# Altium PCB PowerBoard_System_pcb.PcbDoc
Units mm, origin at the board's own origin, x right, y up, seen from the top; angles counter-clockwise.
Board outline 56.84 x 56.84 mm, 2 copper layers (Top Layer, Bottom Layer); 30 components, 28 nets, 108 pads, 0 vias.
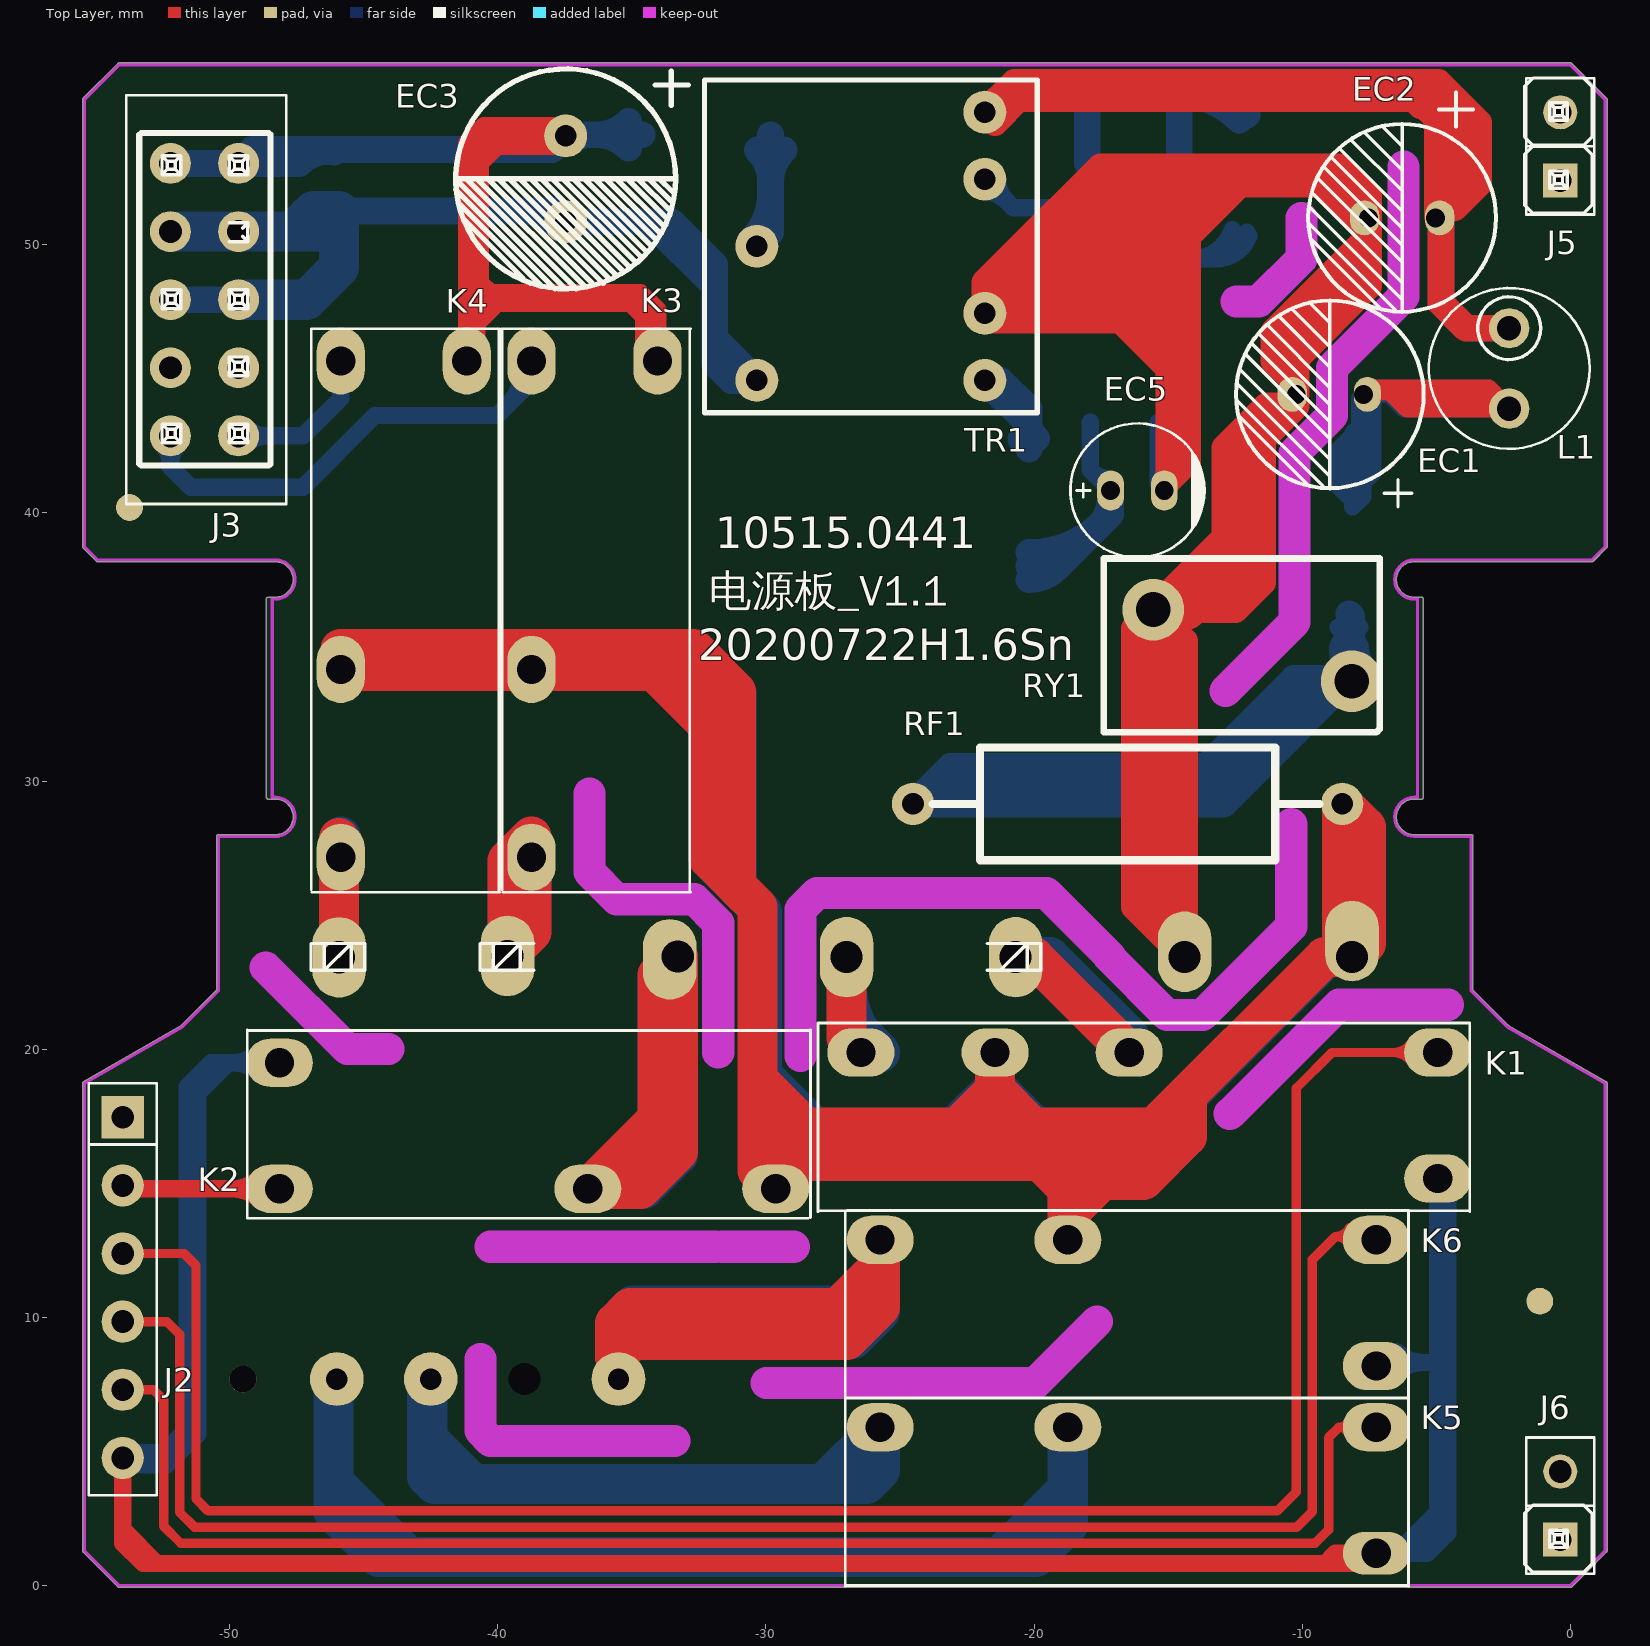
[diagram p0: Top Layer view]
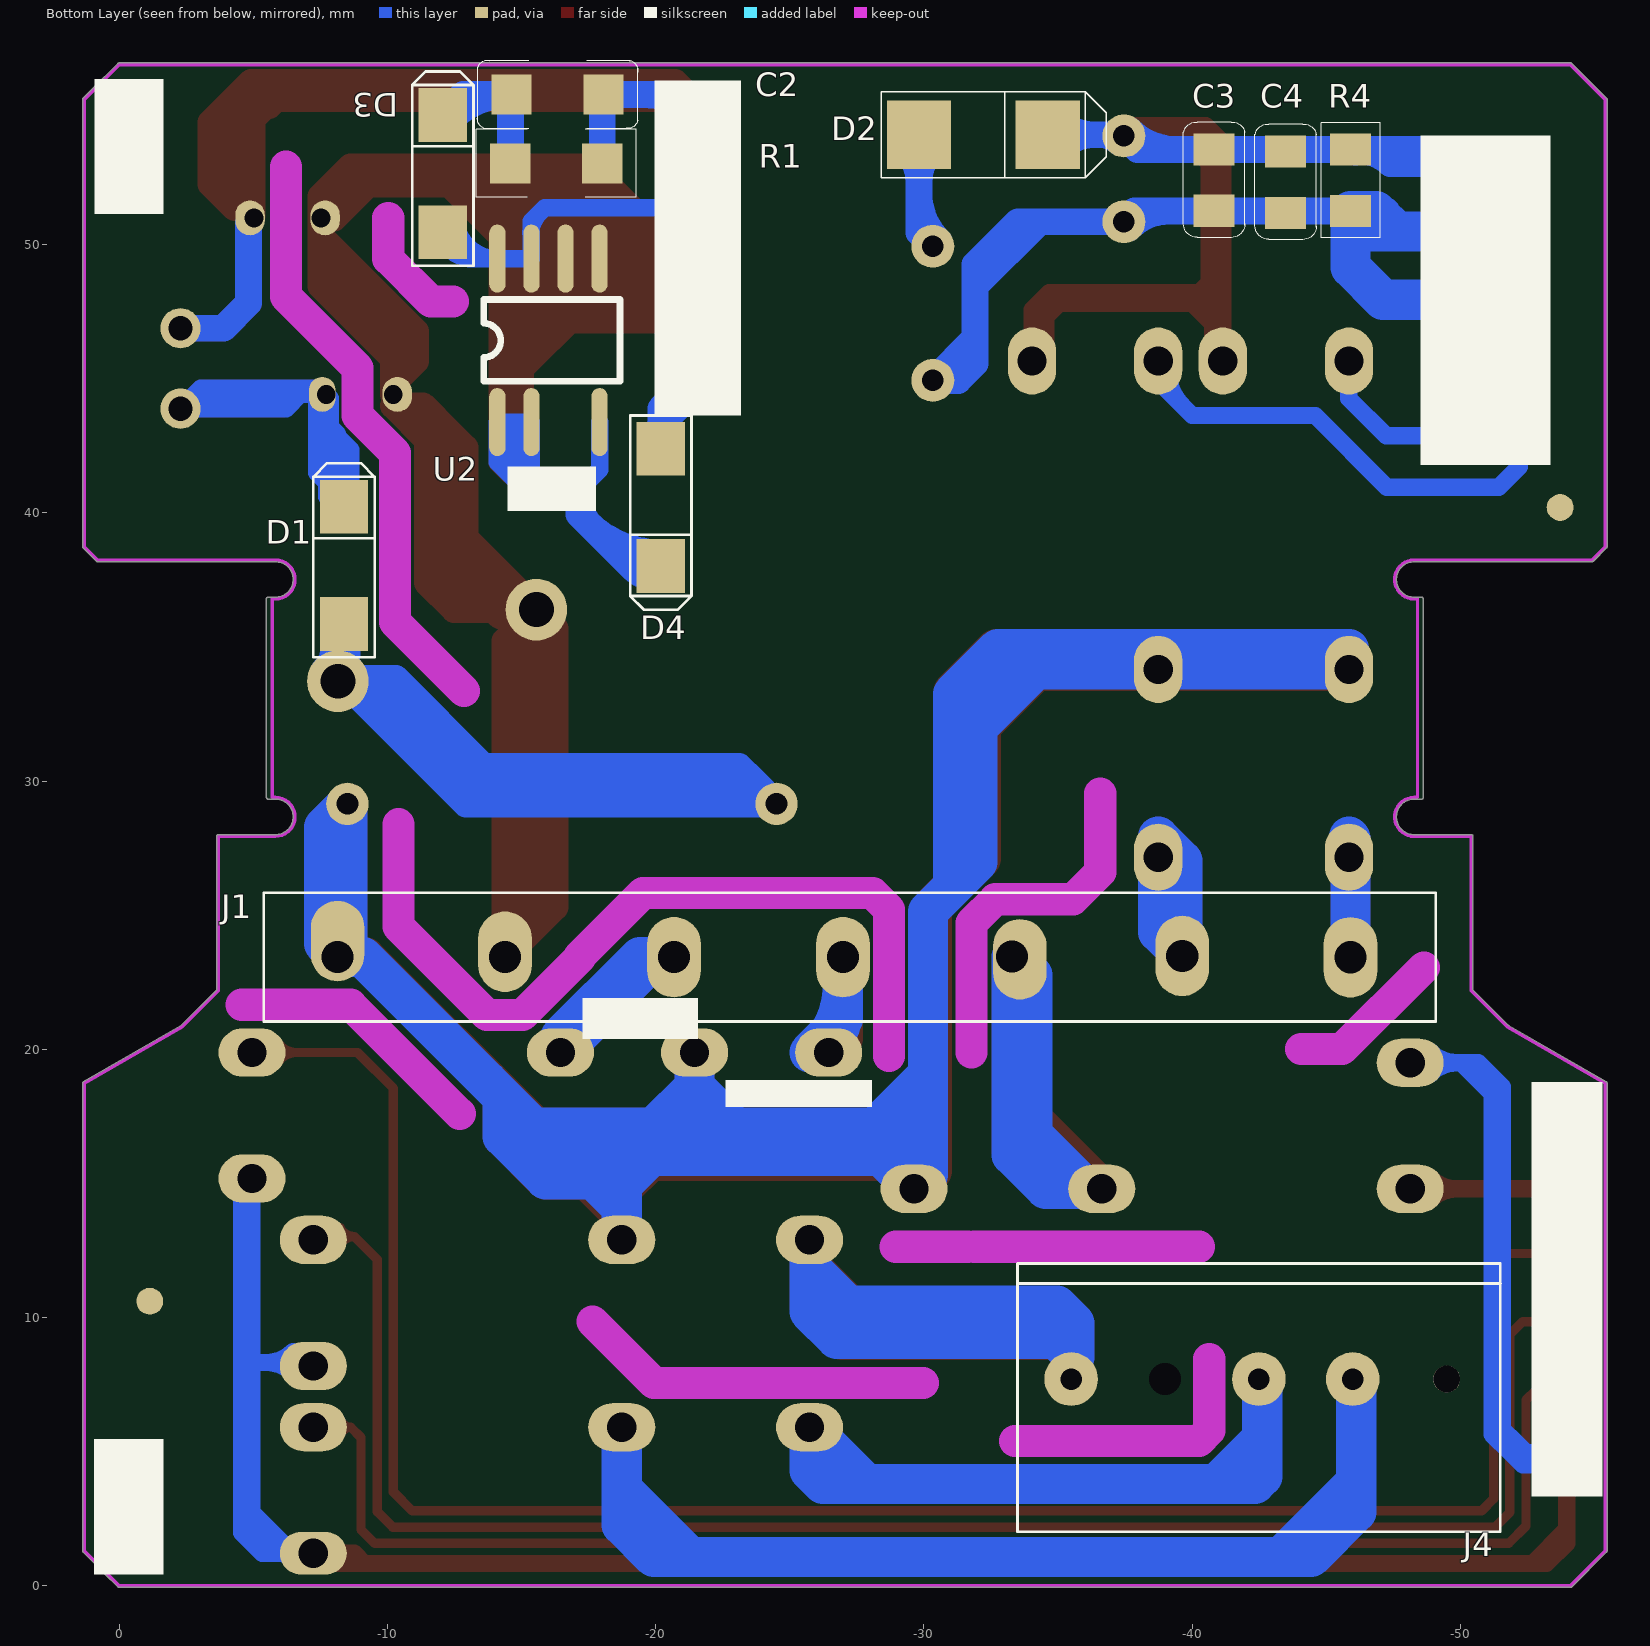
[diagram p1: Bottom Layer view, seen from below]
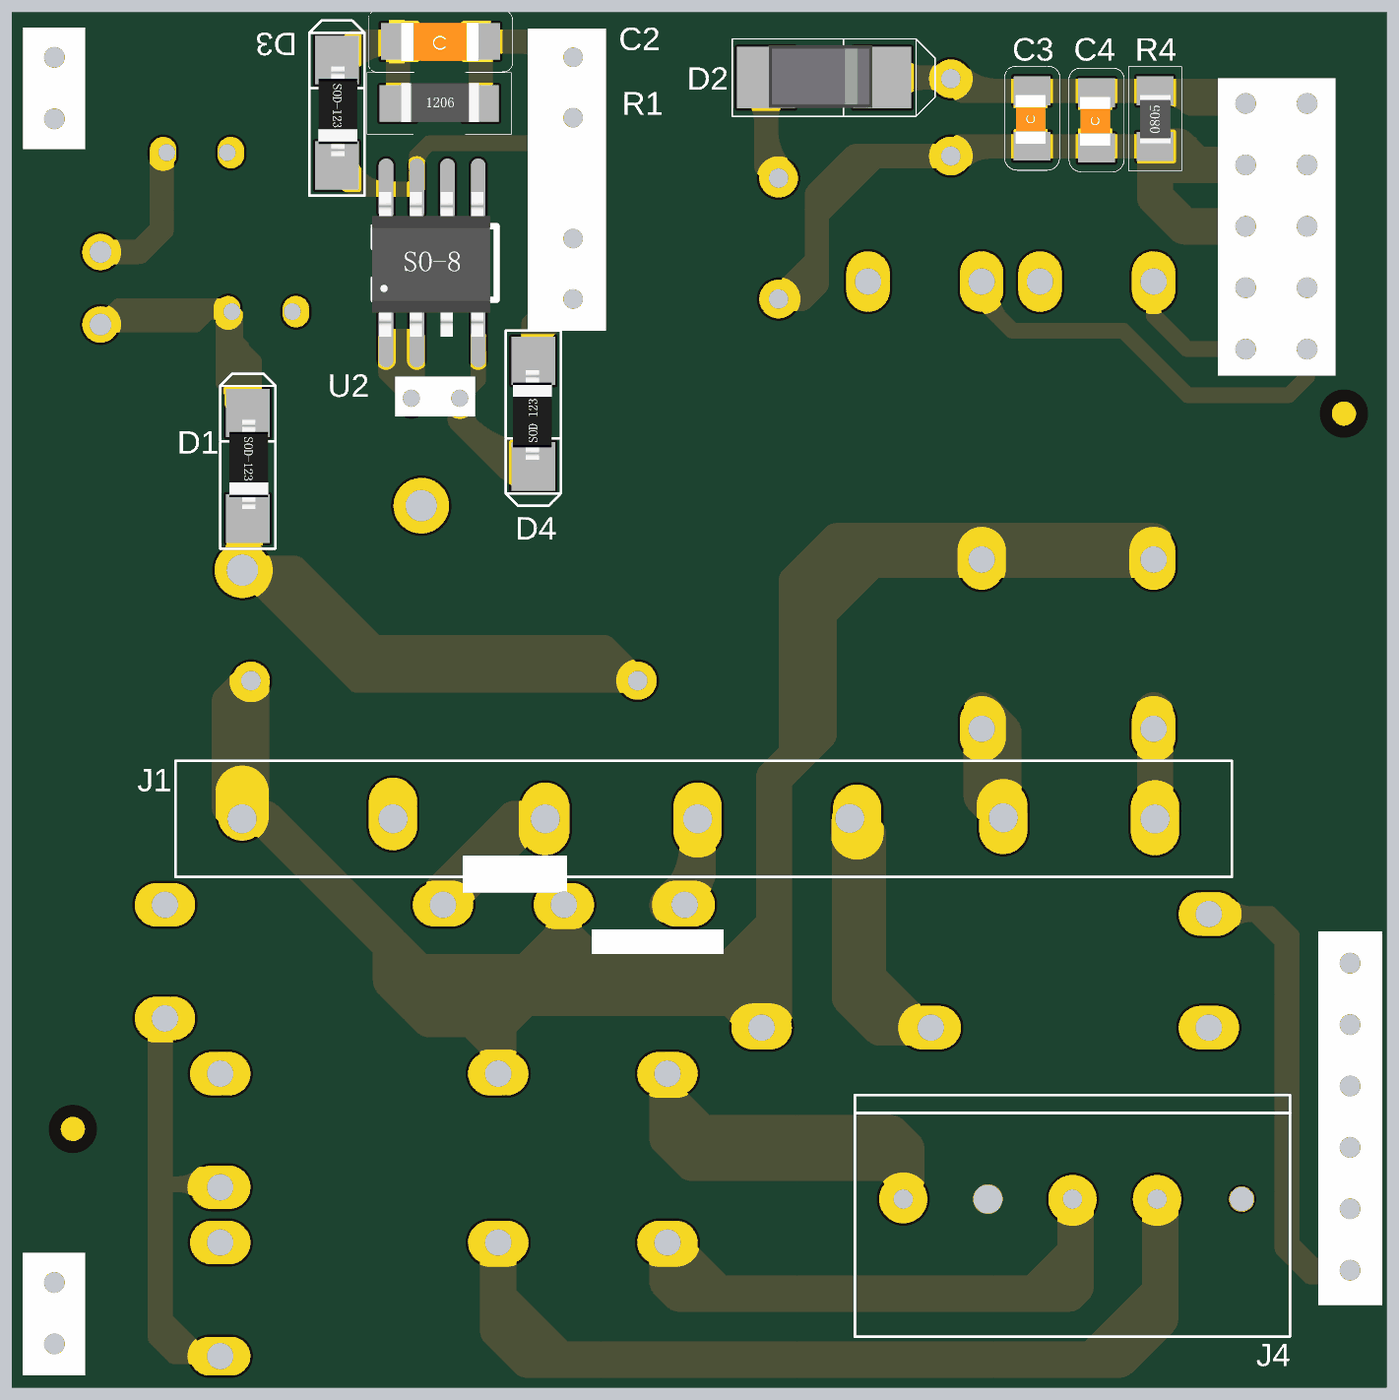
[diagram p2: 3D render of the assembled board from below, using the file's embedded part models]

## Layer stack, top to bottom
Top Layer: signal copper 0.0356
Dielectric: dielectric 0.32, FR-4, Dk 4.8
Bottom Layer: signal copper 0.0356

## Board outline
0.846,55.955 0.546,56.255 ccw(c0.501,56.209) 0.541,56.259 0.546,56.255 cw(c0.501,56.209) 0.55,56.249 0.045,56.755 1.346,55.454 cw(c1.301,55.409) 1.364,55.409 1.364,38.739 cw(c1.301,38.739) 1.346,38.694 0.846,38.194 cw(c0.801,38.239) 0.801,38.175 -5.829,38.175 ccw(c-5.829,37.514) -6.49,37.514 ccw(c-5.829,37.514) -5.829,36.853 -5.554,36.853 cw(c-5.554,36.789) -5.49,36.789 -5.49,29.389 cw(c-5.554,29.389) -5.554,29.325 -5.829,29.325 ccw(c-5.829,28.664) -6.49,28.664 ccw(c-5.829,28.664) -5.829,28.003 -3.699,28.003 cw(c-3.699,27.939) -3.636,27.939 -3.636,22.213 -2.31,20.888 1.332,18.785 cw(c1.301,18.729) 1.364,18.729 1.364,1.301 cw(c1.301,1.301) 1.346,1.255 0.55,0.46 cw(c0.501,0.5) 0.546,0.455 cw(c0.501,0.5) 0.541,0.45 0.55,0.46 cw(c0.501,0.5) 0.546,0.455 cw(c0.501,0.5) 0.545,0.455 cw(c0.501,0.5) 0.541,0.45 0.045,-0.045 cw(c0,0) 0,-0.064 -54.108,-0.064 cw(c-54.108,0) -54.153,-0.045 -55.454,1.255 cw(c-55.409,1.301) -55.473,1.301 -55.473,18.729 cw(c-55.409,18.729) -55.441,18.785 -51.798,20.888 -50.473,22.213 -50.473,27.939 cw(c-50.409,27.939) -50.409,28.003 -48.279,28.003 ccw(c-48.279,28.664) -48.279,29.325 cw(c-48.279,29.389) -48.28,29.325 -48.554,29.325 cw(c-48.554,29.389) -48.618,29.389 -48.618,36.789 cw(c-48.554,36.789) -48.554,36.853 -48.279,36.853 ccw(c-48.279,37.514) -48.279,38.175 cw(c-48.279,38.239) -48.28,38.175 -54.909,38.175 cw(c-54.909,38.239) -54.954,38.194 -55.454,38.694 cw(c-55.409,38.739) -55.473,38.739 -55.473,55.409 cw(c-55.409,55.409) -55.454,55.454 -54.153,56.755 cw(c-54.108,56.709) -54.108,56.773 0,56.773 cw(c0,56.709)

## Design rules (kind name [scope] priority, off if disabled: settings)
Clearance [All] p1: gap=0.1
HoleSize [All] p1 off: absolutevalues=TRUE maxlimit=2.54 minlimit=0.025 maxpercent=80.000 minpercent=20.000
HoleToHoleClearance [All] p1 off: gap=0.254 allowstackedmicrovias=TRUE
LayerPairs [All] p1 off: enforce=TRUE
MinimumSolderMaskSliver [All] p1 off: minsoldermaskwidth=0.254
NetAntennae [All] p1 off: netantennaetolerance=0
PolygonConnect [All] p1: connectstyle=Relief reliefconductorwidth=0.254 reliefentries=4 polygonreliefangle="90 Angle"
RoutingVias [All] p1: holewidth=0.711 width=1.27 viastyle="Through Hole" minholewidth=0.711 minwidth=1.27 maxholewidth=0.711 maxwidth=1.27
SilkToSilkClearance [All] p1 off: silktosilkclearance=0.254
SilkscreenOverComponentPads [IsPad] p1 off: minsilkscreentomaskgap=0.254
SolderMaskExpansion [All] p1: expansion=0.102
Width [All] p1: maxlimit=1.5 minlimit=0.35 preferedwidth=0.65
21 further rules are at their usual default settings.

## Components (designator, comment, footprint, x,y, rotation, side; value= is the part's Value field where it differs from the comment)
C2 "1nF/630V" CAP/SMT/1206C -14.605,55.566 r180 bottom
C3 "1uF/0805" CAP/SMT/0805C -40.829,51.249 r90 bottom
C4 "0.1uF/0805" CAP/SMT/0805C -43.496,51.173 r90 bottom
D1 "1N4007-SOD123" D/SMT/SOD123 -8.382,40.453 r270 bottom
D2 "SS110" D/SMT/DO-214AC -29.845,54.042 r0 bottom
D3 "1N4007-SOD123" D/SMT/SOD123 -12.065,55.058 r270 bottom
D4 "1N4007-SOD123" D/SMT/SOD123 -20.193,37.786 r90 bottom
EC1 "2.2uF/400V" CAP/DIP/2.2UF/400V/2.5mm#1 -7.722,44.416 r90 top
EC2 "2.2uF/400V" CAP/DIP/2.2UF/400V/2.5mm#2 -5.029,50.994 r90 top locked
EC3 "AEC/330uF/25V" CAP/DIP/330UF/25V -37.465,54.042 r270 top locked
EC5 "4.7uF/50V" CAP/DIP/10uF/50V -17.145,40.834 r0 top
J1 "CON/DIP/1×7PIN/端子" CON/DIP/1×7PIN/端子 -26.986,23.436 r0 bottom locked
J2 "1X6PIN" CON/DIP/1×6PIN/2.0MM -53.975,17.466 r270 top locked
J3 "CON/2X5PIN" CON/DIP/2X5PIN/2.54MM -52.197,53.026 r0 top
J4 "XD350-3.5MM" CON/DIP/1×5PIN/3.5MM -49.492,6.315 r0 bottom locked
J5 "1X2PIN_2.54MM" CON/DIP/1×2PIN/2.54MM -0.381,52.391 r180 top
J6 "1X2PIN_2.54MM" CON/DIP/1×2PIN/2.54MM -0.381,1.718 r180 top
K1 "HF46FB/012-ZS3" RELAY/HF46FB-012-ZS3 -4.953,15.18 r270 top
K2 "HF46F/012-HS1T" RELAY/HF46F-012-HSIT#1 -48.133,19.498 r90 top
K3 "HF46F/012-HS1T" RELAY/HF46F-012-HSIT#1 -34.036,45.66 r0 top
K4 "HF46F/012-HS1T" RELAY/HF46F-012-HSIT#1 -41.148,45.66 r0 top
K5 "HF46F/012-HS1T" RELAY/HF46F-012-HSIT#2 -7.239,1.21 r270 top
K6 "HF46F/012-HS1T" RELAY/HF46F-012-HSIT#1 -7.239,8.195 r270 top
L1 "2.2mH/色环电感" L/DIP/1mH -2.286,43.882 r90 top locked
R1 "100K/1206" 1206R -14.605,53.026 r180 bottom
R4 "4.7K/0805" 0805R -45.909,51.249 r90 bottom
RF1 "100R/2W" FUSE/10R/2W -8.509,29.15 r180 top
RY1 "TDK471KD10" RES/RY/TDK471KD10 -16.256,36.389 r0 top
TR1 "L/TRANS/DIP/TUANSFORMER_UF" TRANS/DIP/TUANSFORMER_UF/EE13 -25.273,48.962 r180 top
U2 "PN8034SSC-R1B" SMD-8B -14.097,43.374 r90 bottom

## Footprints (in the part's own frame and the unit in brackets; to place one, negate y for a bottom-side part, rotate by r counter-clockwise, add the part's x,y. Pads: shape width x height; smd on the part's side, far side on the other; paste and mask are expansions set on the pad)
0805R [mm]
  rect 1.2x1.524 smd: 1(0,0) 2(2.3,0)
  silkscreen extent -1,-1.1 3.3,1.1, body extent 0.13,-0.64 2.13,0.62, height 0.55
1206R [mm]
  rect 1.5x1.5 smd: 1(-0.02,0) 2(3.409,0)
  silkscreen extent -1.29,-1.27 4.68,1.27, body extent 0.13,-0.76 3.33,0.84, height 0.6
CAP/DIP/2.2UF/400V/2.5mm#1 [mm] "R=4.1MM  脚间距:3.2mm"
  oval 1.3x1 hole 0.7 copper offset 0,-0.15: 1(0,0)
  oval 1.3x1.1 hole 0.7 copper offset 0,0.15: 2(0,2.5)
  silkscreen extent -4.19,-2.25 3.5,4.75
CAP/DIP/2.2UF/400V/2.5mm#2 [mm] "R=4.1MM  脚间距:3.2mm"
  oval 1.3x1.1 hole 0.7 copper offset 0,-0.15: 1(0,0)
  oval 1.3x1.1 hole 0.7 copper offset 0,0.15: 2(0,2.5)
  silkscreen extent -3.5,-2.25 3.5,4.75
CAP/DIP/10uF/50V [mm]
  oval 1x1.5 hole 0.7: 1(0,0) 2(2,0)
  silkscreen extent -1.5,-2.5 3.5,2.5
CAP/DIP/330UF/25V [mm] "R=4.1MM  脚间距:3.2mm"
  round 1.6 hole 0.8: 1(-0.009,0.004) 2(3.191,0.004)
  silkscreen extent -2.51,-4.1 5.69,4.57
CAP/SMT/0805C [mm]
  rect 1.2x1.524 smd: 1(0.01,0.01) 2(2.296,0.01)
  silkscreen extent -0.99,-1.13 3.32,1.15, body extent -0.38,-0.64 2.62,0.76, height 0.93
CAP/SMT/1206C [mm]
  rect 1.5x1.5 smd: 1(0.026,0.025) 2(3.455,0.025)
  silkscreen extent -1.25,-1.24 4.73,1.3, body extent -0.38,-0.89 3.82,0.91, height 0.95
CON/DIP/1×2PIN/2.54MM [mm]
  rect 1.27x1.27 hole 0.85: 1(0,0)
  round 1.27 hole 0.85: 2(0,-2.54)
  silkscreen extent -1.27,-3.81 1.27,1.27
CON/DIP/1×5PIN/3.5MM [mm]
  round 1 hole 1: 1(0,-1.39)
  round 2 hole 0.8: 2(3.5,-1.39) 3(7,-1.39) 5(14,-1.39)
  round 1 hole 1.2: 4(10.5,-1.39)
  silkscreen extent -2,-5.7 16,4.3
CON/DIP/1×6PIN/2.0MM [mil]
  rect 62x62 hole 33.46 mask+4: 1(0,0)
  round 62 hole 33.46 mask+4: 2(100,0) 3(200,0) 4(300,0) 5(400,0) 6(500,0)
  silkscreen extent -50,-50 555,50
CON/DIP/1×7PIN/端子 [mm]
  oval 2x3 hole 1.2 copper offset 0,-0.6: 1(18.841,0)
  oval 2x3 hole 1.2 copper offset 0,-0.2: 2(12.6,0)
  oval 2x3 hole 1.2: 3(6.3,0) 4(0,0) 6(-12.645,-0.043) 7(-18.92,0.007)
  oval 2x3 hole 1.2 copper offset -0.3,0.1: 5(-6.295,-0.018)
  silkscreen extent -22.1,-2.4 21.6,2.4
CON/DIP/2X5PIN/2.54MM [mil]
  round 60 hole 33.46: 1(0,0) 2(100,0) 3(0,-100) 4(100,-100) 5(0,-200) 6(100,-200) 7(0,-300) 8(100,-300) 9(0,-400) 10(100,-400)
  silkscreen extent -65,-500 170,100
D/SMT/DO-214AC [mil]
  rect 94.49x100 smd: 1(-187.98,-2) 2(1,-2)
  silkscreen extent -274,-65 56,61, body extent -190,-55 15,47, height 40
D/SMT/SOD123 [mm]
  rect 2x1.8 smd: 1(0.229,0) 2(4.597,0)
  silkscreen extent -1.4,-1.14 5.84,1.14, body extent 0.51,-0.76 4.21,0.84, height 1.2
FUSE/10R/2W [mil]
  round 62 hole 32: 1(0,0) 2(629.92,0)
  silkscreen extent 33,-83 601,83
L/DIP/1mH [mm]
  round 1.5 hole 0.9: 1(0,0) 2(3,0)
  silkscreen extent -1.5,-3 4.5,3
RELAY/HF46F-012-HSIT#1 [mm] "LWH(20.5*7* 15.3MM)"
  oval 1.8x2.5 hole 1.092: 1(-4.7,-18.5) 2(-4.7,-11.5) 3(0,0) 4(-4.7,0)
  silkscreen extent -5.8,-19.8 1.23,1.2
RELAY/HF46F-012-HSIT#2 [mm] "LWH(20.5*7* 15.3MM)"
  oval 1.8x2.5 hole 1.092: 1(-4.7,-18.5) 2(-4.7,-11.5) 4(-4.7,0)
  oval 1.6x2.5 hole 1.092: 3(0,0)
  silkscreen extent -5.8,-19.8 1.23,1.2
RELAY/HF46FB-012-ZS3 [mm]
  oval 1.8x2.5 hole 1.092: 1(-4.7,-16.5) 2(-4.7,-11.5) 3(-4.699,-21.5) 4(-4.7,0) 5(0,0)
  silkscreen extent -5.8,-23.1 1.23,1.2
RES/RY/TDK471KD10 [mm]
  round 2.3 hole 1.3: 1(0.7,0) 2(8.1,-2.667)
  silkscreen extent -1.14,-4.57 9.14,1.91
SMD-8B [mil] "SMD-8B"
  oval 100x24 smd: 1(0.27,-0.17) 2(0.27,-50.17) 4(0.27,-150.17) 5(240.27,-150.17) 6(240.27,-100.17) 7(240.27,-50.17) 8(240.27,-0.17)
  silkscreen extent 60,-180 180,20, body extent 0,-170 236,23, height 67
TRANS/DIP/TUANSFORMER_UF/EE13 [mm]
  round 1.6 hole 0.8: 1(-3.437,4.025) 2(-3.437,1.525) 3(-3.437,-3.475) 4(-3.437,-5.975) 5(5.063,-0.975) 6(5.063,4.025)
  silkscreen extent -5.39,-7.17 7.01,5.23

## Part data
C2: library part CAP/CAP/SMT/1206C
C3 C4: library part CAP/CAP/SMT/0805C
D1 D3 D4: library part D/D/SMT/1N4007-SOD123
D2: library part D/D/SMT/SS110/DO-214
EC1 EC2: library part CAP/AEC/DIP/2.2uF/400V
EC3: library part CAP/AEC/DIP/330uF/25V
EC5: library part CAP/AEC/DIP/10uF/50V
J2: library part CON/DIP/1X6PIN_2MM, "Connector"
J3: library part CON/DIP/2X5PIN, "Connector"
J4: library part CON/DIP/1X5PIN/XD350-3.5MM, "Connector"
J5 J6: library part CON/DIP/1X2PIN_2.54MM, "Connector"
K1: library part RELAY/GENERAL/DIP/HF46FB/012-ZS3
K2 K3 K4 K5 K6: library part RELAY/GENERAL/DIP/HF46F/012-HS1T
L1: library part L/L/DIP/JYGX68-1.0mH/300mA, "工字电感"
R1: library part RES/RES/SMT/1206
R4: library part RES/RES/SMT/0805
RF1: library part FUSE/FUSE/DIP/3.15A
RY1: library part RES/RY/DIP/TDK471KD10
U2: library part IC/POWER/SMT/PN8034SSC-R1B/SOP-8

## Free pads (board coordinates)
  round 2 on Top Solder: 0(-53.721,40.199) 0(-1.143,10.608)
  round 1 all layers, no hole: 0(-53.721,40.199) 0(-1.143,10.608)
  round 2 on Bottom Solder: 0(-53.721,40.199) 0(-1.143,10.608)

## Nets (pads, with @x,y where several pads share a name; then routed paths per layer and width w, separated by ;. In a path a pad name is that pad's centre, name@x,y a point inside that pad or via, vN(x,y) a via of type N, cw(c..) or ccw(c..) an arc to the next point about the centre after c; other vN are vias at no path point)
+12V: C3.2 C4.2 D2.1 EC3.1 J3.1 J3.2 K3.3 K4.3 R4.2 | length 74
  Top Layer w0.65: K4.3 -41.148,48.2 ; -40.894,47.819 -39.751,47.819 ; K4.3@-40.767,46.041 -40.767,47.692 -40.259,48.2 ; -40.767,47.057 -40.005,47.819 -39.751,47.819 ; -39.615,54.051 -40.005,53.661 ; EC3.1@-37.833,54.423 -40.513,54.423 -41.148,53.788 -41.148,53.026 ; K3.3@-34.544,46.168 -34.544,47.311 -35.052,47.819 ; K3.3 -34.036,47.565 -34.671,48.2 -35.433,48.2 ; -41.148,48.2 -40.259,48.2 ; -41.148,48.2 -41.148,53.026 ; -41.148,53.026 -40.123,54.051 EC3.1 -37.851,53.661 -40.005,53.661 ; -40.259,48.2 -35.433,48.2 ; -40.259,48.2 -40.64,48.581 -40.64,53.026 -40.005,53.661 ; -39.751,47.819 -35.052,47.819 ; -35.433,48.2 -35.052,47.819
  Bottom Layer w1: J3.1 J3.2 ; -46.736,53.549 -46.863,53.549 -47.386,53.026 ; R4.2@-46.087,53.45 ccw(c-46.319,51.96) -47.386,53.026 ; R4.2@-45.909,53.545 C3.2 -37.967,53.545 EC3.1 -37.419,54.093 D2.1 ; R4.2 -49.134,53.549 J3.2 ; -39.407,53.545 ccw(c-39.407,55.998) EC3.1@-37.673,54.263 ; EC3.1@-37.249,53.839 cw(c-36.636,53.226) -36.636,54.093 ; D2.1@-35.115,53.598 ccw(c-36.31,52.403) -36.31,54.093 ccw(c-36.31,55.783) D2.1@-35.115,54.588 ; J3.2 -47.386,53.026
AC_ZERO1: J3.7
ACTOR_HEATB: J4.5 K6.1 | length 55.2
  Top Layer w1.5: -34.972,9.164 -33.658,9.164 -26.971,9.164 -25.739,10.396 -25.739,13.022 -25.739,11.92 -27.305,10.354 -33.782,10.354 ; -33.782,10.354 -35.052,10.354 -35.619,9.788 -35.619,8.518 -33.782,10.354
  Bottom Layer w1.5: -34.925,9.211 -33.611,9.211 -26.75,9.211 -25.739,10.222 K6.1@-25.739,13.022 ; -25.739,11.878 -27.18,10.438 -32.385,10.438 -33.699,10.438 ; -33.699,10.438 -34.969,10.438 -35.619,9.788 -35.619,8.518 -33.699,10.438
CLOSE: J1.3 K1.2 | length 17.5
  Top Layer w1.5: J1.3 -20.009,23.436 K1.2
  Bottom Layer w1.5: J1.3 -20.009,23.436 K1.2 -16.453,20.475 -19.414,23.436 J1.3
GND: C3.1 C4.1 EC3.2 J3.3 J3.4 J3.5 J3.6 R4.1 TR1.6 | length 52.7
  Bottom Layer w1: J3.5 J3.6 -46.99,47.946 -46.101,48.835 R4.1@-46.101,51.248 ; -47.243,51.249 R4.1 ; R4.1@-46.608,51.249 R4.1 ; -39.146,51.249 cw(c-39.146,49.167) EC3.2@-37.673,50.639 ; -34.309,50.851 -31.912,48.454 ; R4.1 -37.859,51.249 EC3.2 -33.512,50.851 -31.912,49.252 -31.912,48.454 ; -31.912,46.514 TR1.6 -31.281,44.937 -31.912,45.569 -31.912,46.514 ; -31.912,46.514 -31.912,48.454
  Bottom Layer w1.5: J3.3 -47.625,50.486 ; J3.6 -47.117,47.946 -45.909,49.154 R4.1 -46.862,51.249 -47.625,50.486 ; -46.355,50.486 -47.625,50.486
HIGH: J1.7 K4.1 | length 9
  Top Layer w1.5: J1.7 K4.1@-45.906,27.864
  Bottom Layer w1.5: J1.7 -45.906,27.864 K4.1@-45.848,27.922
LINE: J1.1 K1.1 K2.1 K3.2 K4.2 K6.2 RF1.1 | length 290.3
  Top Layer w1.5: K4.2@-45.848,34.922 -38.736,34.922 -32.696,34.922 -31.115,33.341 -31.115,26.102 -30.306,25.293 ; K4.2@-45.791,34.103 -34.163,34.103 ; -34.982,34.922 -34.163,34.103 ; -33.528,34.922 -32.131,33.525 -32.131,32.071 ; -30.306,16.323 -29.819,15.836 -28.596,15.836 ; -30.052,17.085 -28.448,17.085 ; -22.733,17.202 -21.453,18.482 ; -21.453,17.202 -21.453,18.482 ; K1.1 -21.453,18.482 ; -20.066,17.095 -21.453,18.482 ; K6.2@-18.739,13.022 -18.739,15.815 ; -18.739,13.858 -17.471,15.126 ; -18.739,14.799 -19.776,15.836 -28.596,15.836 ; -18.739,17.015 -18.739,15.815 ; -17.469,17.085 -18.739,15.815 ; -14.296,18.301 -14.296,18.273 -14.304,18.265 -14.304,16.751 -15.93,15.126 -17.471,15.126 ; J1.1@-8.145,25.086 -7.637,25.595 ; -34.163,34.103 -32.131,32.071 ; -32.131,32.071 -32.131,27.118 -30.306,25.293 ; -30.306,18.863 -30.306,17.847 -30.306,15.471 K2.1 -28.596,15.836 ; -30.306,18.863 -28.528,17.085 -28.448,17.085 ; -30.306,18.863 -30.306,25.293 ; -28.596,15.836 -27.346,17.085 ; -28.448,17.085 -27.346,17.085 ; -27.346,17.085 -20.32,17.085 ; -20.32,17.085 -15.512,17.085 ; -20.32,17.085 -20.009,17.085 -18.739,15.815 ; -17.471,15.126 -15.512,17.085 ; -15.512,17.085 -9.161,23.436 J1.1 ; RF1.1 -7.637,28.278 -7.637,25.595 ; RF1.1 -8.509,23.8 J1.1 ; RF1.1 -8.145,28.787 J1.1 ; J1.1 -7.637,23.945 -7.637,25.595
  Bottom Layer w1.5: K4.2 -34.16,34.16 ; K4.2@-45.848,34.922 K3.2@-38.736,34.922 ; K3.2@-38.733,34.925 -34.036,34.925 ; -28.194,17.085 -30.152,19.043 ; -22.977,17.085 -21.453,18.609 ; -21.453,17.166 -21.453,18.609 ; K1.1 -21.453,18.609 ; -19.929,17.085 -21.453,18.609 ; K6.2@-18.739,13.022 -18.739,16.634 ; -18.739,14.094 -15.748,17.085 ; -18.739,14.926 -19.839,16.026 -28.405,16.026 ; -18.739,15.688 -17.342,17.085 ; -18.739,15.815 -20.009,17.085 -20.32,17.085 ; -17.685,15.149 -15.907,15.149 -14.304,16.751 -14.304,18.225 -13.721,18.808 ; -34.16,34.16 -32.004,32.004 ; -34.16,34.16 -32.004,32.004 ; -34.036,34.925 -32.004,32.893 -32.004,32.004 ; -34.036,34.925 -32.766,34.925 -31.085,33.244 -31.085,26.065 ; -32.004,32.004 -32.004,26.985 -31.085,26.065 ; -31.085,26.065 -30.152,25.133 -30.152,19.043 ; -30.152,19.043 -30.152,15.317 K2.1 ; K2.1 -29.633,16.408 -28.956,17.085 -27.346,17.085 ; K2.1 -28.405,16.026 ; -28.405,16.026 -27.346,17.085 ; -27.346,17.085 -20.32,17.085 ; -20.32,17.085 -15.748,17.085 ; -15.748,17.085 -15.443,17.085 -9.092,23.436 J1.1 ; J1.1 J1.1@-7.747,23.835 ; J1.1 -8.509,23.8 RF1.1 -7.637,28.278 J1.1@-7.637,25.323 ; J1.1@-7.747,23.835 -7.637,23.945 J1.1@-7.637,25.323 ; J1.1@-7.747,23.835 -7.747,25.213 J1.1@-7.637,25.323
LINKAGEA: J4.3 K5.1 | length 28.6
  Bottom Layer w1.5: J4.3@-42.619,7.814 -42.619,5.493 ; -40.259,3.797 -42.338,3.797 -42.619,4.078 -42.619,5.493 ; -42.619,5.493 -40.923,3.797 -27.852,3.797 ; -27.852,3.797 K5.1 -25.739,4.3 -26.242,3.797 -27.852,3.797
LINKAGEB: J4.2 K5.2 | length 44.9
  Bottom Layer w1.5: J4.2@-46.119,7.705 -46.119,3.877 ; -43.307,1.068 -43.309,1.068 -46.119,3.877 ; -21.463,1.068 -21.295,1.068 -18.739,3.623 ; K5.2 -18.739,3.623 ; -46.119,3.877 -46.119,2.752 -44.434,1.068 -19.939,1.068 -18.739,2.268 -18.739,3.623
LOW: J1.5 K2.2 | length 42.9
  Top Layer w1.5: J1.5@-33.354,23.454 -34.036,22.772 -34.036,17.395 K2.2 -34.672,14.798 -33.281,16.189 J1.5
  Bottom Layer w1.5: J1.5@-34.04,22.768 -34.04,16.835 ; -33.281,17.593 -34.04,16.835 ; J1.5 -33.281,16.062 -34.545,14.798 K2.2 -36.076,14.798 -34.04,16.835
MAINBOARD_+12V: J2.6 K1.5 K2.3 K5.3 K6.3 | length 137.5
  Top Layer w0.65: -53.975,2.099 -52.705,0.829 -52.197,0.829 ; J2.6 -53.975,1.591 -53.213,0.829 -52.197,0.829 ; -52.197,0.829 -9.398,0.829 -9.144,0.829 ; -9.144,0.829 -7.62,0.829 K5.3 -8.763,1.21 -9.144,0.829
  Bottom Layer w0.65: J2.6@-53.975,4.512 -52.324,4.512 -51.88,4.957 ; J2.6@-53.785,4.957 -52.451,4.957 ; -51.562,5.846 -51.562,18.609 -51.181,18.99 ; -51.181,6.29 -51.181,6.227 -52.451,4.957 ; -49.911,19.498 -50.038,19.498 -51.181,18.355 ; K2.3@-48.89,19.092 ccw(c-49.871,18.11) -49.871,19.498 ccw(c-49.871,20.887) K2.3@-48.89,19.905 ; K2.3 -50.673,19.498 -51.181,18.99 ; K6.3@-7.239,8.322 -5.08,8.322 ; K5.3@-6.789,1.035 ccw(c-6.789,2.593) -5.688,1.491 ; K6.3@-6.482,7.916 cw(c-5.501,6.934) -5.501,8.322 cw(c-5.501,9.711) K6.3@-6.482,8.729 ; -4.953,2.734 -6.477,1.21 K5.3 ; -52.451,4.957 -51.88,4.957 ; -51.88,4.957 -51.181,5.655 -51.181,8.83 -51.181,18.355 ; -51.181,18.355 -51.181,18.99 ; K5.3 -5.969,1.21 -4.953,2.226 ; K5.3 -5.334,1.21 -4.572,1.972 -4.572,2.607 ; -4.953,2.226 -4.953,9.465 -4.953,14.545 -5.588,15.18 K1.5 -4.572,14.799 -4.572,9.084 -4.572,2.607 ; -4.953,2.226 -4.572,2.607
MID: J1.6 K3.1 | length 22.1
  Top Layer w1.5: J1.6 -38.736,24.375 -38.736,27.922 -39.631,27.027 J1.6
  Bottom Layer w1.5: J1.6@-39.808,24.156 ccw(c-42.397,26.745) K3.1@-38.736,26.745 ; J1.6 -38.736,24.375 -38.736,27.922 -39.631,27.027 J1.6
NetC2_1: C2.1 D3.1 R1.1 | length 7.9
  Bottom Layer w1: R1.1 C2.1@-14.585,55.546 ; D3.1@-12.348,54.647 ccw(c-14.63,52.365) -14.63,55.592 -12.827,55.592 D3.1
NetC2_2: C2.2 EC2.1 L1.2 R1.2 TR1.4 | length 68.4
  Top Layer w1: TR1.4 -20.727,56.046 -4.925,56.046 -3.429,54.55 -3.429,52.264 -3.874,51.82 -4.318,51.375 -4.318,54.042 -4.953,54.677 ; TR1.4@-21.456,54.557 -20.574,55.439 -5.842,55.439 -5.588,55.185 -5.461,55.185 -4.953,54.677 ; L1.2 -3.889,46.882 -4.826,47.819 -4.826,50.937 -4.953,51.064 -4.953,54.677
  Bottom Layer w1: TR1.4 -21.181,55.592 C2.2 ; TR1.4@-21.623,54.725 cw(c-19.531,52.633) -19.531,55.592 ; R1.2 C2.2@-18.014,55.546 ; EC2.1@-4.826,50.797 -4.826,47.819 -3.889,46.882 L1.2
NetD1_1: D1.1 EC1.1 L1.1 | length 52.1
  Top Layer w0.65: EC1.1 -7.493,44.644 -3.048,44.644 -2.667,44.263 -6.477,44.263 -6.731,44.517 ; EC1.1@-7.366,44.517 -6.731,44.517 ; L1.1 -6.096,43.882 -6.731,44.517
  Bottom Layer w0.65: D1.1@-8.374,40.725 D1.1@-8.255,40.605 ; L1.1@-2.477,44.073 -2.667,43.882 -6.223,43.882 -6.756,44.416 EC1.1 ; -8.636,41.723 -8.636,40.986 -8.509,40.859 D1.1@-8.255,40.605 ; -8.636,41.723 -8.128,41.215 D1.1@-8.128,40.224 ; -8.636,41.723 -8.636,42.358 -7.747,43.247 ; D1.1@-8.255,40.605 -7.899,40.961 -7.366,41.494 -7.366,44.06 EC1.1 ; D1.1@-8.128,40.224 -7.747,40.605 -7.747,42.231 ; D1.1@-8.128,40.224 -8.128,42.941 -7.865,43.204 -7.865,44.272 EC1.1@-7.747,44.39 ; D1.1@-8.128,40.224 -8.128,41.85 -7.747,42.231 ; -7.747,42.231 -7.747,43.247 ; -7.747,43.247 EC1.1@-7.747,44.39 ; EC1.1@-7.747,44.39 -7.493,44.644 -3.048,44.644 L1.1 -2.819,44.416 EC1.1 ; EC1.1@-7.747,44.39 EC1.1
NetD1_2: D1.2 RF1.2 RY1.2 | length 74.6
  Bottom Layer w0.65: RY1.2@-8.739,34.306 ccw(c-9.908,35.475) D1.2@-8.255,35.475 ; D1.2@-8.662,35.731 cw(c-9.643,34.749) -8.255,34.749 cw(c-6.867,34.749) D1.2@-7.848,35.731 ; RY1.2@-8.255,33.821 D1.2@-8.255,36.237 ; D1.2@-8.255,35.953 ccw(c-5.925,35.953) RY1.2@-7.573,34.306 ; RY1.2 -8.128,33.75 D1.2@-8.128,35.856
  Bottom Layer w1: -12.242,29.835 -12.445,30.038 -23.621,30.038 ; D1.2@-8.255,36.237 -8.156,36.138 RY1.2 ; RF1.2 -23.621,30.038 ; RF1.2 -12.926,29.15 -11.529,30.547 ; RF1.2 -20.955,29.15 -19.558,30.547 ; -23.621,30.038 -23.112,30.547 -19.558,30.547 ; -19.558,30.547 -13.589,30.547 ; -13.589,30.547 -10.315,33.821 RY1.2@-8.255,33.821 ; -13.589,30.547 -12.573,30.547 ; -12.573,30.547 -9.299,33.821 RY1.2@-8.255,33.821 ; -12.573,30.547 -11.529,30.547 ; -11.529,30.547 RY1.2@-8.255,33.821
  Bottom Layer w1.5: D1.2@-8.255,34.927 ccw(c-6.951,34.927) RY1.2@-7.873,34.005
NetD2_2: D2.2 TR1.5 | length 9
  Bottom Layer w1: TR1.5@-30.548,50.149 ccw(c-32.306,51.907) -29.82,51.907 ; TR1.5 -29.82,50.453 D2.2 ; D2.2@-30.315,53.528 cw(c-31.51,52.333) -29.82,52.333 cw(c-28.13,52.333) D2.2@-29.325,53.528
NetD3_2: D3.2 TR1.3 U2.7 U2.8 | length 18.3
  Bottom Layer w0.65: TR1.3@-21.836,51.962 cw(c-21.836,50.815) -21.025,51.626 cw(c-20.214,52.437) TR1.3@-21.361,52.437 ; TR1.3 -20.774,51.375 -15.875,51.375 -15.371,50.872 U2.7 U2.8 ; -15.64,51.141 cw(c-16.338,50.442) U2.7@-15.351,50.442 ; -13.194,49.477 ccw(c-13.194,50.745) D3.2@-11.994,50.337 ; D3.2@-12.61,50.546 cw(c-14.101,51.052) U2.8 ; D3.2 -13.049,49.477 U2.8
NetD4_1: D4.1 EC5.1 U2.4 | length 17
  Bottom Layer w0.65: U2.4 -17.911,41.601 EC5.1 ; -17.871,41.56 ccw(c-17.145,42.285) EC5.1@-17.145,41.259
  Bottom Layer w1: D4.1@-20.193,37.515 ccw(c-20.193,39.007) -19.138,37.952 ; D4.1 -19.075,38.015 -17.145,39.945 EC5.1 ; D4.1@-20.193,38.515 ccw(c-20.193,42.422) -17.431,39.659 ; D4.1@-19.999,38.365 ccw(c-19.396,39.455) -18.516,38.574 ; D4.1@-19.91,37.733 cw(c-19.227,37.05) -19.227,38.015 cw(c-19.227,38.981) D4.1@-19.91,38.298 ; -17.597,39.494 ccw(c-18.688,40.584) EC5.1@-17.145,40.584
NetD4_2: D4.2 TR1.1 | length 16
  Bottom Layer w1: TR1.1@-21.803,44.639 cw(c-21.627,43.036) -20.487,44.176 ; -20.548,44.238 cw(c-21.323,43.463) D4.2@-20.495,42.745 ; D4.2@-20.476,42.766 ccw(c-21.159,43.449) -20.193,43.449 ; D4.2@-20.476,42.766 ccw(c-21.159,43.449) -20.193,43.449 ; D4.2@-20.476,42.766 ccw(c-21.159,43.449) -20.193,43.449 ; D4.2@-20.476,42.766 ccw(c-21.159,43.449) -20.193,43.449 ; -20.193,43.449 ccw(c-19.227,43.449) D4.2@-19.91,42.766 ; -20.193,43.449 ccw(c-19.227,43.449) D4.2@-19.91,42.766 ; -20.193,43.449 ccw(c-19.227,43.449) D4.2@-19.91,42.766 ; -20.193,43.449 ccw(c-19.227,43.449) D4.2@-19.91,42.766 ; TR1.1 -20.193,43.295 D4.2 -20.193,43.882 -21.248,44.937 TR1.1
NINE: EC1.2 EC2.2 EC5.2 J1.2 RY1.1 TR1.2 U2.1 U2.2 | length 248.1
  Top Layer w0.65: -17.145,47.311 -15.145,45.311 EC5.2 ; -15.145,50.74 EC5.2 ; -14.605,49.311 -14.605,42.104 -15.145,41.564 EC5.2 ; -14.097,52.01 -14.097,49.978 ; -12.065,52.264 -14.097,50.232 -14.097,49.978 ; EC5.2 -15.113,40.834 -14.097,41.85 -14.097,49.978
  Top Layer w1: -20.633,48.64 -20.633,49.793 ; -19.431,50.994 -18.278,50.994 -18.913,50.359 ; RY1.1@-16.016,35.93 cw(c-17.125,34.82) -15.556,34.82 cw(c-13.987,34.82) RY1.1@-15.096,35.93 ; -14.642,37.304 RY1.1 ; J1.2 -14.386,35.22 RY1.1 ; -12.294,37.609 -12.598,37.304 -13.183,37.304 -12.294,38.193 -12.294,38.421 ; -10.222,45.76 -7.529,48.453 -7.529,50.105 ; -9.284,52.264 -15.875,52.264 ; TR1.2 -19.299,49.974 -18.913,50.359 ; TR1.2 -20.702,47.437 -15.875,52.264 ; TR1.2 -21.836,48.59 -20.633,49.793 ; -20.633,49.793 -17.526,52.899 ; -18.913,50.359 -17.008,52.264 -15.875,52.264 ; -17.526,52.899 -8.636,52.899 -7.529,51.793 EC2.2 ; -17.526,52.899 -9.919,52.899 -8.014,50.994 EC2.2 ; -16.256,25.306 -16.256,28.769 ; -16.256,25.306 J1.2@-14.478,23.528 ; -16.256,25.306 -15.748,25.814 -15.748,27.753 ; -16.256,28.769 -16.256,35.689 RY1.1 ; -16.256,28.769 -16.256,28.261 -15.748,27.753 ; -15.748,27.753 -15.113,27.118 -15.113,24.163 J1.2@-14.478,23.528 ; RY1.1 -15.556,28.958 -14.478,27.88 ; RY1.1 -14.732,35.565 -14.732,28.134 -14.478,27.88 ; RY1.1 -12.889,39.056 ; RY1.1 -12.497,36.389 -11.487,37.399 -11.487,42.728 -10.222,43.994 -11.319,43.994 -12.319,42.993 ; J1.2@-14.478,23.528 -14.478,27.88 ; -12.889,39.056 -12.889,42.423 -12.319,42.993 ; -12.889,39.056 -12.319,39.056 -12.319,42.993 ; -7.529,50.105 EC2.2 ; -7.529,50.105 -7.529,50.069 -8.509,49.089 -8.509,48.708 -10.222,46.996 EC1.2 -10.222,44.833 -11.049,45.66 -11.049,46.757 -7.529,50.277 EC2.2
  Top Layer w1.5: TR1.2 -16.128,47.437 -15.145,46.454 ; -19.558,48.581 -18.288,48.581 ; RY1.1 -14.326,36.389 -12.294,38.421 ; -15.145,51.724 -18.288,48.581 ; -15.145,52.232 -15.145,49.851 ; -13.462,52.264 -15.145,50.581 -15.145,49.851 ; -18.288,48.581 -17.018,49.851 -15.145,49.851 ; -18.288,48.581 -15.145,48.581 -15.145,49.851
  Bottom Layer w0.65: RY1.1 RY1.1@-15.145,36.8 ; EC5.2@-15.371,41.061 U2.2 -14.732,43.381 ; EC5.2 -14.101,41.878 U2.1 -14.732,43.381 ; EC5.2@-14.732,41.247 -14.732,43.381
  Bottom Layer w1: RY1.1 RY1.1@-15.556,36.429
OPEN: J1.4 K1.3 | length 13.3
  Top Layer w1.5: J1.4 -26.986,20.413 K1.3
  Bottom Layer w1.5: -26.986,21.417 ccw(c-25.486,21.417) K1.3@-26.034,20.02 ; J1.4@-26.986,22.409 ccw(c-23.56,22.409) K1.3@-25.983,19.986 ; J1.4 -26.986,21.128 K1.3@-25.739,19.88 ; K1.3@-26.593,20.734 cw(c-27.446,19.88) K1.3@-26.239,19.88
RELAY_HEAT: J2.5 K5.4 | length 56.6
  Top Layer w0.35: J2.5 -52.832,7.306 -52.451,6.925 -52.451,2.226 -51.808,1.583 -9.525,1.583 -9.017,2.091 -9.017,5.528 -8.635,5.91 ; K5.4@-8.268,5.656 ccw(c-8.635,5.518) -8.635,5.91 ; K5.4@-8.268,6.165 cw(c-8.635,6.302) -8.635,5.91 ; K5.4 -8.635,5.91
RELAY_HIGH: J3.10 K4.4 | length 10.4
  Bottom Layer w0.65: J3.10 -47.244,42.866 -45.848,44.262 K4.4@-45.848,46.422 ; J3.10@-49.348,42.557 cw(c-48.602,41.811) -48.602,42.866 cw(c-48.602,43.921) J3.10@-49.348,43.175 ; K4.4@-46.255,45.666 cw(c-47.236,44.684) -45.848,44.684 cw(c-44.46,44.684) K4.4@-45.441,45.666
RELAY_LINK: J2.4 K6.4 | length 65.1
  Top Layer w0.35: J2.4 -52.324,9.846 -51.847,9.369 -51.847,2.734 -51.3,2.187 -10.199,2.187 -9.621,2.765 -9.621,12.163 -8.762,13.022 ; K6.4@-8.237,12.698 ccw(c-8.762,12.436) -8.762,13.022 ; K6.4@-8.237,13.347 cw(c-8.762,13.609) -8.762,13.022 ; K6.4@-7.239,13.022 -8.762,13.022
RELAY_LOW: J2.2 K2.4 | length 8
  Top Layer w0.65: J2.2@-53.975,14.798 K2.4 ; K2.4@-48.89,14.392 ccw(c-49.871,13.41) -49.871,14.798 ccw(c-49.871,16.187) K2.4@-48.89,15.205
RELAY_MID: J3.9 K3.4 | length 24.9
  Bottom Layer w0.65: J3.9@-52.506,42.557 cw(c-53.252,41.811) -52.197,41.811 cw(c-51.142,41.811) J3.9@-51.888,42.557 ; J3.9 -52.197,41.723 -51.435,40.961 -47.252,40.961 -44.585,43.628 -40.005,43.628 K3.4@-38.736,44.897 ; -39.609,44.024 ccw(c-40.772,45.188) K3.4@-39.263,45.843 ; K3.4@-39.089,45.618 cw(c-39.649,44.897) K3.4@-38.736,44.897 ; K3.4@-38.934,44.7 ccw(c-39.831,45.597) K3.4@-38.667,46.102 ; K3.4@-38.736,46.422 K3.4@-38.736,44.897 ; K3.4@-38.383,45.618 ccw(c-37.823,44.897) K3.4@-38.736,44.897
RELAY_OPEN: J2.3 K1.4 | length 75.6
  Top Layer w0.35: J2.3 -51.689,12.386 -51.243,11.94 -51.243,3.242 -50.792,2.791 -10.93,2.791 -10.225,3.496 -10.225,18.544 -8.89,19.879 -6.604,19.879 ; K1.4@-5.92,19.499 ccw(c-6.603,19.077) -6.603,19.88 ; K1.4@-5.92,20.261 cw(c-6.603,20.683) -6.603,19.88 ; K1.4 -6.603,19.88
pads on no net: J2.1 J3.8 J4.1 J4.4 J5.1 J5.2 J6.1 J6.2 U2.5 U2.6

## Keep-outs
Keep-Out Layer:
  lines w0.127: -55.409,1.301 -54.108,0 0,0 1.301,1.301 1.301,18.729 -2.35,20.837 -3.699,22.187 -3.699,23.175 -3.699,27.939 -5.829,27.939 cw(c-5.829,28.664) -5.829,29.389 -5.704,29.389 -5.704,36.789 -5.829,36.789 cw(c-5.829,37.514) -5.829,38.239 0.801,38.239 1.301,38.739 1.301,55.409 0,56.709 -54.108,56.709 -55.409,55.409 -55.409,38.739 -54.909,38.239 -48.279,38.239 cw(c-48.279,37.514) -48.279,36.789 -48.404,36.789 -48.404,29.389 -48.279,29.389 cw(c-48.279,28.664) -48.279,27.939 -50.409,27.939 -50.409,23.175 -50.409,22.187 -51.759,20.837 -55.409,18.729 -55.409,1.301
  lines w1.2: -48.641,23.054 -45.593,20.006 -44.069,20.006 ; -40.64,8.449 -40.64,5.782 -40.259,5.401 -33.401,5.401 ; -40.259,12.64 -31.877,12.64 ; -36.576,29.531 -36.576,26.61 -35.56,25.594 -32.664,25.594 -31.775,24.705 -31.775,19.879 ; -31.623,12.64 -28.956,12.64 ; -29.972,7.56 -19.939,7.56 -17.653,9.846 ; -28.702,19.752 -28.702,25.213 -28.092,25.823 -19.533,25.823 -17.145,23.435 ; -17.196,23.435 -15.037,21.276 -13.716,21.276 -10.414,24.578 -10.414,28.388 ; -12.86,33.359 -10.287,35.932 -10.287,42.231 -8.89,43.628 -8.89,45.395 ; -12.7,17.593 -8.636,21.657 -4.572,21.657 ; -12.446,47.879 -11.624,47.879 -10.033,49.47 -10.033,50.994 ; -7.735,46.549 -8.89,45.395 ; -6.223,52.899 -6.223,48.062 -8.89,45.395

## Silkscreen, mask and mechanical layers (free items; w line width, h text height)
Top Overlay:
  drawing of 248 lines, arcs and shapes, not listed
  text "10515.0441" at -31.877,38.294 h2
  text "电源板_V1.1" at -32.131,36.135 h2
  text "20200722H1.6Sn" at -32.512,34.103 h2
Bottom Overlay:
  rectangle: -23.19,43.628 -19.964,56.125
  rectangle: -55.309,3.319 -52.654,18.787
  rectangle: -1.651,0.423 0.94,5.478
  rectangle: -1.651,51.147 0.914,56.176
  rectangle: -53.365,41.774 -48.514,54.068
  region: -17.272,21.911 -21.59,21.911 -21.59,20.387 -17.272,20.387
  region: -22.606,18.863 -28.067,18.863 -28.067,17.847 -22.606,17.847
Mechanical 1:
  lines w0.127: -37.15,12.03 -33.41,12.03 -33.41,2.03